# Altium PCB chip-arduino.PcbDoc
Units mil, origin at the board's own origin, x right, y up, seen from the top; angles counter-clockwise.
Board outline 640 x 680 mil, 2 copper layers (Top Layer, Bottom Layer); 13 components, 12 nets, 64 pads, 0 vias.
Unrouted connection lines stored in the file: 32.
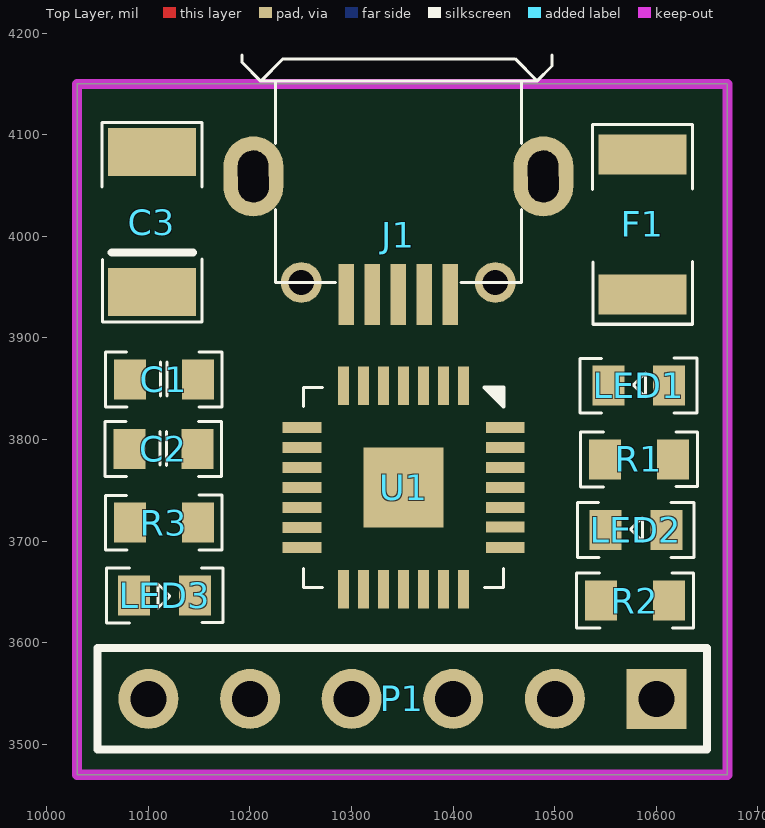
[diagram p0: Top Layer view]
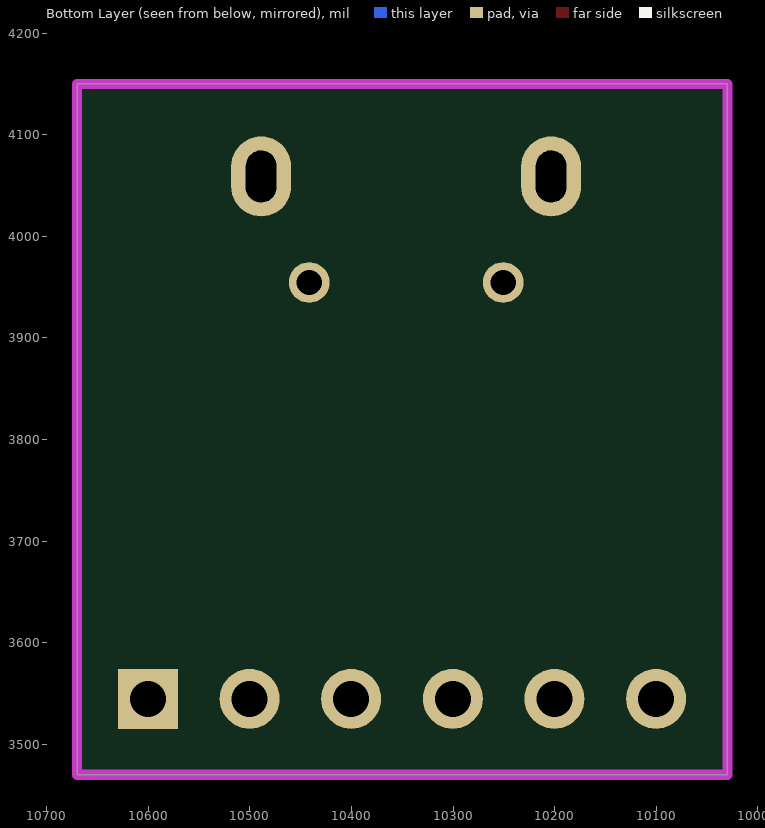
[diagram p1: Bottom Layer view, seen from below]

## Layer stack, top to bottom
Top Layer: signal copper 1.4
Dielectric: dielectric 12.6, FR-4, Dk 4.8
Bottom Layer: signal copper 1.4

## Board outline
10030,4150 10670,4150 10670,3470 10030,3470 10030,4150

## Design rules (kind name [scope] priority, off if disabled: settings)
Clearance 15 [All] p1 off: gap=11
Clearance [All] p2: gap=8
PolygonConnect [All] p1: connectstyle=Direct reliefconductorwidth=10 reliefentries=4 polygonreliefangle="90 Angle"
RoutingVias [All] p1: holewidth=28 width=50 viastyle="Through Hole" minholewidth=28 minwidth=50 maxholewidth=28 maxwidth=50
SilkscreenOverComponentPads [All] p1: minsilkscreentomaskgap=10
SolderMaskExpansion [All] p1: expansion=4
TestPointUsage [All] p1: valid=0 allowmultiple=FALSE
Testpoint [All] p1: side=15 testpointundercomponent=TRUE minsize=40 maxsize=100 preferedsize=60 minholesize=0 maxholesize=40 preferedholesize=32 testpointgrid=1 style=1023 order=0123456789
Width [All] p1: maxlimit=50 minlimit=9 preferedwidth=10 minimp=50.000000 maximp=50.000000 favimp=50.000000
23 further rules are at their usual default settings.

## Components (designator, comment, footprint, x,y, rotation, side; value= is the part's Value field where it differs from the comment)
C1 "1uF/0603" C_0603 10115.47,3859.15 r0 top
C2 "1uF/0603" C_0603 10114.93,3790.81 r0 top
C3 "10uF/10V" C_1206 10103.65,4013.89 r90 top
F1 "500mA/1206" F_1206 10586.47,4011.76 r90 top
J1 "MINI USB A" "MICRO USB DIP" 10346.15,4000.74 r0 top
LED1 "BLUE/0603" LED_0603 10582.79,3853.05 r0 top
LED2 "BLUE/0603" LED_0603 10579.94,3711.02 r0 top
LED3 "BLUE/0603" LED_0603 10116.17,3646.4 r180 top
P1 "Header 6" HDR1X6 10600.2,3544.69 r180 top
R1 "1K/0603" R_0603 10582.79,3780.3 r180 top
R2 "1K/0603" R_0603 10578.9,3641.32 r180 top
R3 "1K/0603" R_0603 10115.47,3718.17 r0 top
U1 "CP2102" "CP2102 QFN" 10351.37,3752.69 r270 top

## Footprints (in the part's own frame and the unit in brackets; to place one, negate y for a bottom-side part, rotate by r counter-clockwise, add the part's x,y. Pads: shape width x height; smd on the part's side, far side on the other; paste and mask are expansions set on the pad)
C_0603 [mm]
  rect 0.8x1 smd: 1(-0.85,0) 2(0.85,0)
  silkscreen extent -1.46,-0.69 1.46,0.69
C_1206 [mm]
  rect 1.2x2.2 smd: 1(-1.751,-0.002) 2(1.75,0)
  silkscreen extent -2.5,-1.25 2.49,1.25
"CP2102 QFN" [mil] "QFN, 28-Leads, Body 5.0x5.0mm (max), Pitch 0.50mm, IPC Medium Density"
  rect 38x11 smd: 1(-100,59.06) 2(-100,39.37) 3(-100,19.68) 4(-100,0) 5(-100,-19.68) 6(-100,-39.37) 7(-100,-59.06) 15(100,-59.06) 16(100,-39.37) 17(100,-19.68) 18(100,0) 19(100,19.68) 20(100,39.37) 21(100,59.06)
  rect 78.74x78.74 smd: 3(0,0)
  rect 11x38 smd: 8(-59.06,-100) 9(-39.37,-100) 10(-19.68,-100) 11(0,-100) 12(19.68,-100) 13(39.37,-100) 14(59.06,-100) 22(59.06,100) 23(39,100) 24(19.68,100) 25(0,100) 26(-19.68,100) 27(-39.37,100) 28(-59.06,100)
  silkscreen extent -98,-98 98,98
F_1206 [mm]
  rect 1x2.2 smd: 1(-1.751,-0.002) 2(1.75,0)
  silkscreen extent -2.5,-1.25 2.49,1.25
HDR1X6 [mm] "Connector; Header; 6 Position"
  rect 1.5x1.5 hole 0.9: 1(0,0)
  round 1.5 hole 0.9: 2(2.54,0) 3(5.08,0) 4(7.62,0) 5(10.16,0) 6(12.7,0)
  silkscreen extent -1.27,-1.27 13.97,1.27
LED_0603 [mm]
  rect 0.8x1 smd: 1(0.762,0) 2(-0.762,0)
  silkscreen extent -1.46,-0.69 1.46,0.69
"MICRO USB DIP" [mm]
  rect 0.381x1.524 smd: D+(0,-1.475) D-(0.65,-1.475) GND(-1.3,-1.475) ID(-0.65,-1.475) VBUS(1.3,-1.475)
  oval 1.5x2 hole 0.762 slot 1.3 at 90.5 deg: GND(-3.625,1.475) GND(3.625,1.475)
  round 1.016 hole 0.635: GND(-2.425,-1.175) GND(2.425,-1.175)
  silkscreen extent -3.91,-1.17 3.84,4.51
R_0603 [mm]
  rect 0.8x1 smd: 1(-0.85,0) 2(0.85,0)
  silkscreen extent -1.46,-0.69 1.46,0.69

## Part data
C1 C2: library part Cap, "Capacitor"
C3: library part CAP2, "Bi-Polar Capacitor"
F1 R1 R2 R3: library part Res1, "Resistor"
LED1 LED2 LED3: library part LED2, "Typical RED, GREEN, YELLOW, AMBER GaAs LED"
P1: "Header, 6-Pin"
U1: library part Component_1

## Nets (pads, with @x,y where several pads share a name; then routed paths per layer and width w, separated by ;. In a path a pad name is that pad's centre, name@x,y a point inside that pad or via, vN(x,y) a via of type N, cw(c..) or ccw(c..) an arc to the next point about the centre after c; other vN are vias at no path point)
3V3: C1.2 P1.5 U1.6
5V: C2.2 C3.1 F1.1 P1.6 R1.2 R2.2 R3.2 U1.7 U1.8
D+: J1.D+ U1.4
D-: J1.D- U1.5
DTR: P1.1 U1.28
GND: C1.1 C2.1 C3.2 J1.GND LED3.2 P1.2 U1.3
NetLED1_1: LED1.1 R1.1
NetLED2_1: LED2.1 R2.1
NetLED3_1: LED3.1 R3.1
RXD: LED2.2 P1.3 U1.25
TXD: LED1.2 P1.4 U1.26
VBUS: F1.2 J1.VBUS
pads on no net: J1.ID U1.1 U1.2 U1.9 U1.10 U1.11 U1.12 U1.13 U1.14 U1.15 U1.16 U1.17 U1.18 U1.19 U1.20 U1.21 U1.22 U1.23 U1.24 U1.27

## Keep-outs
Keep-Out Layer:
  the board outline again, w10